# Altium PCB F407ZGT6.PcbDoc (part 1 of 7)
Units mil, origin at the board's own origin, x right, y up, seen from the top; angles counter-clockwise.
Board outline 4380 x 3940 mil, 2 copper layers (Top Layer, Bottom Layer); 88 components, 146 nets, 552 pads, 268 vias.
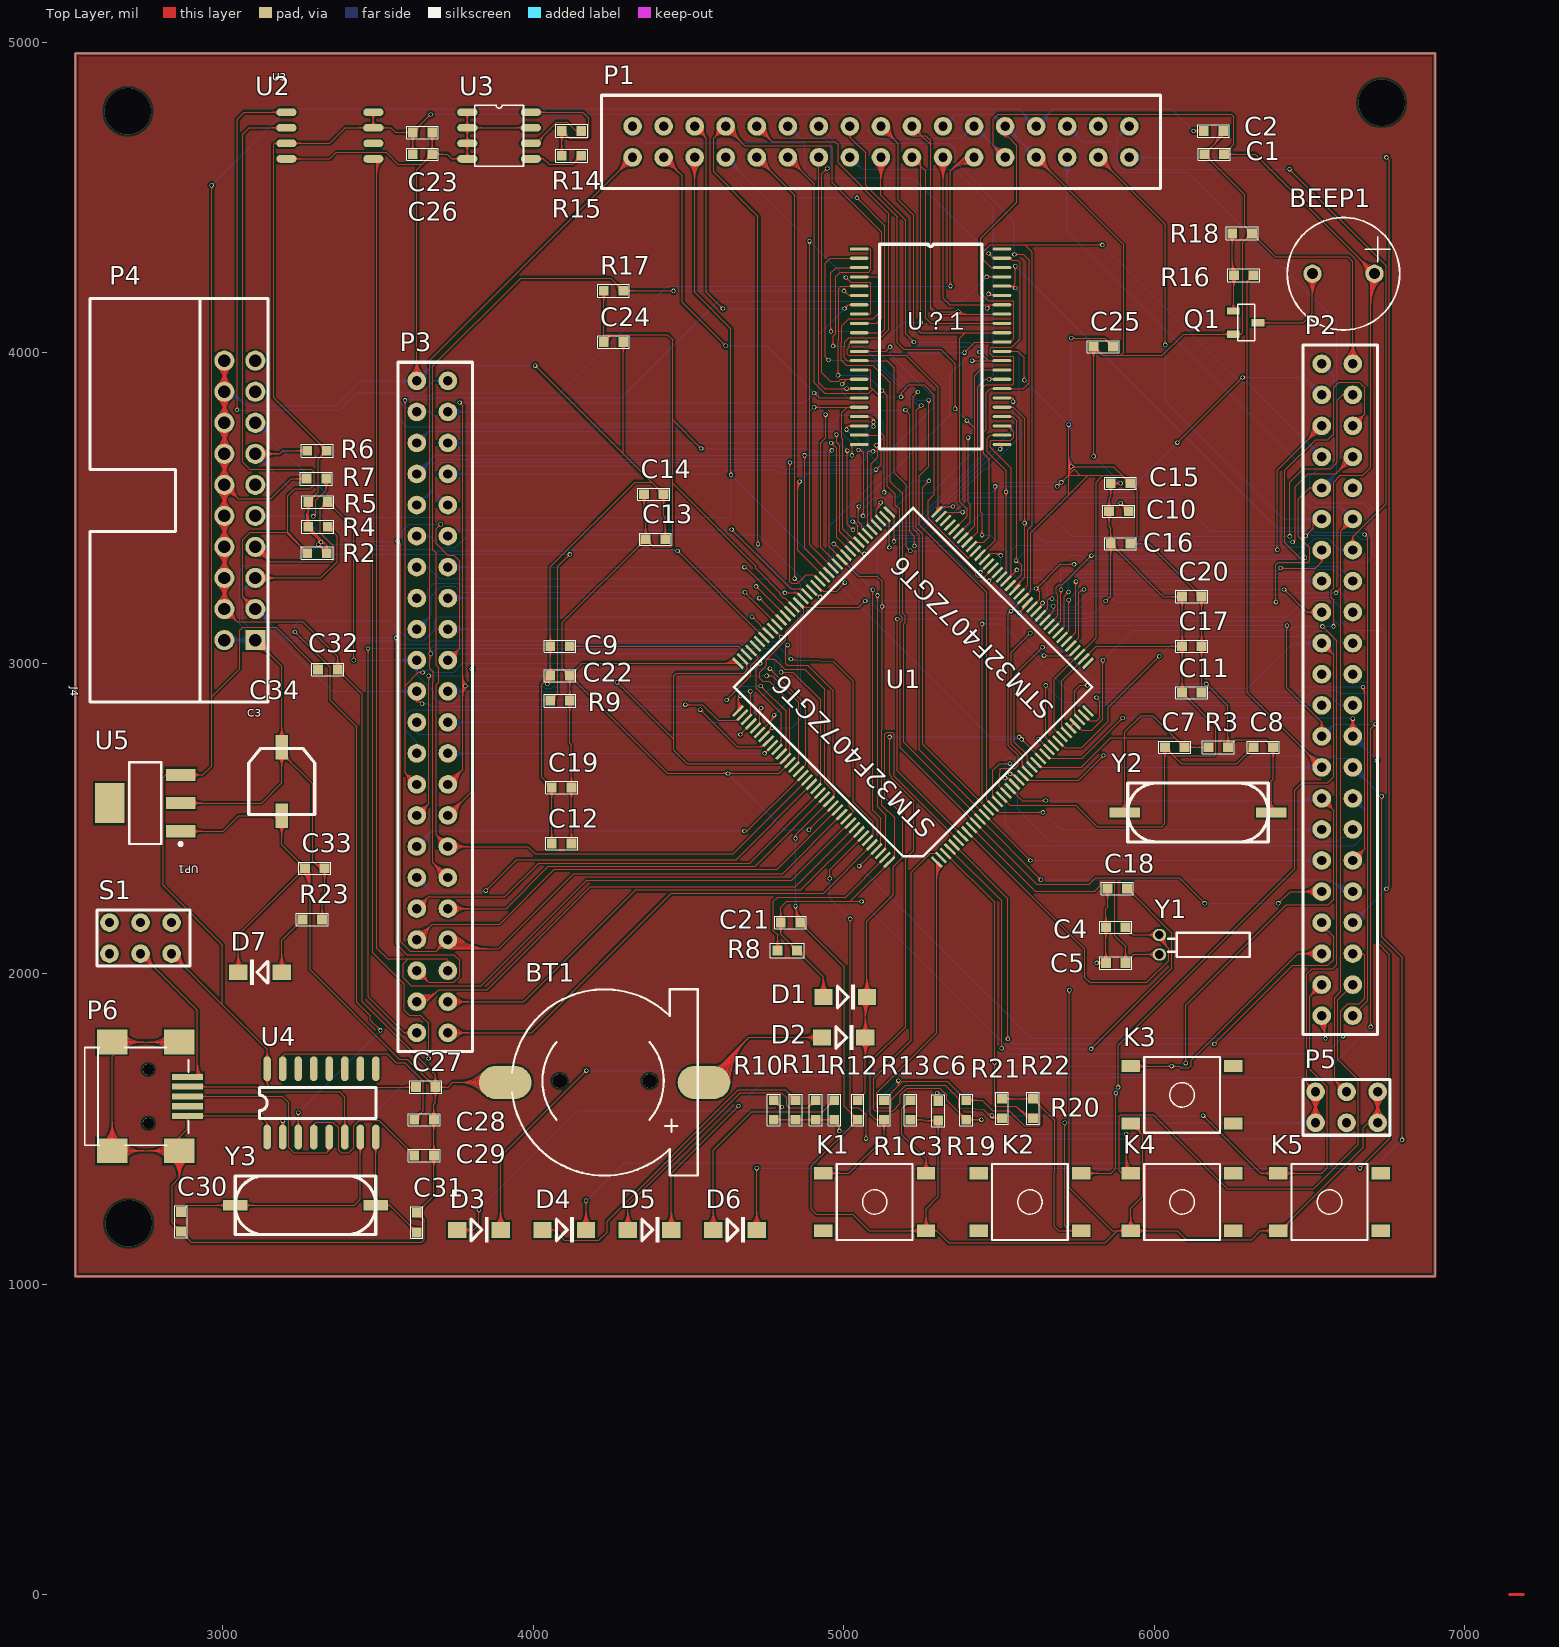
[diagram p0: Top Layer view]
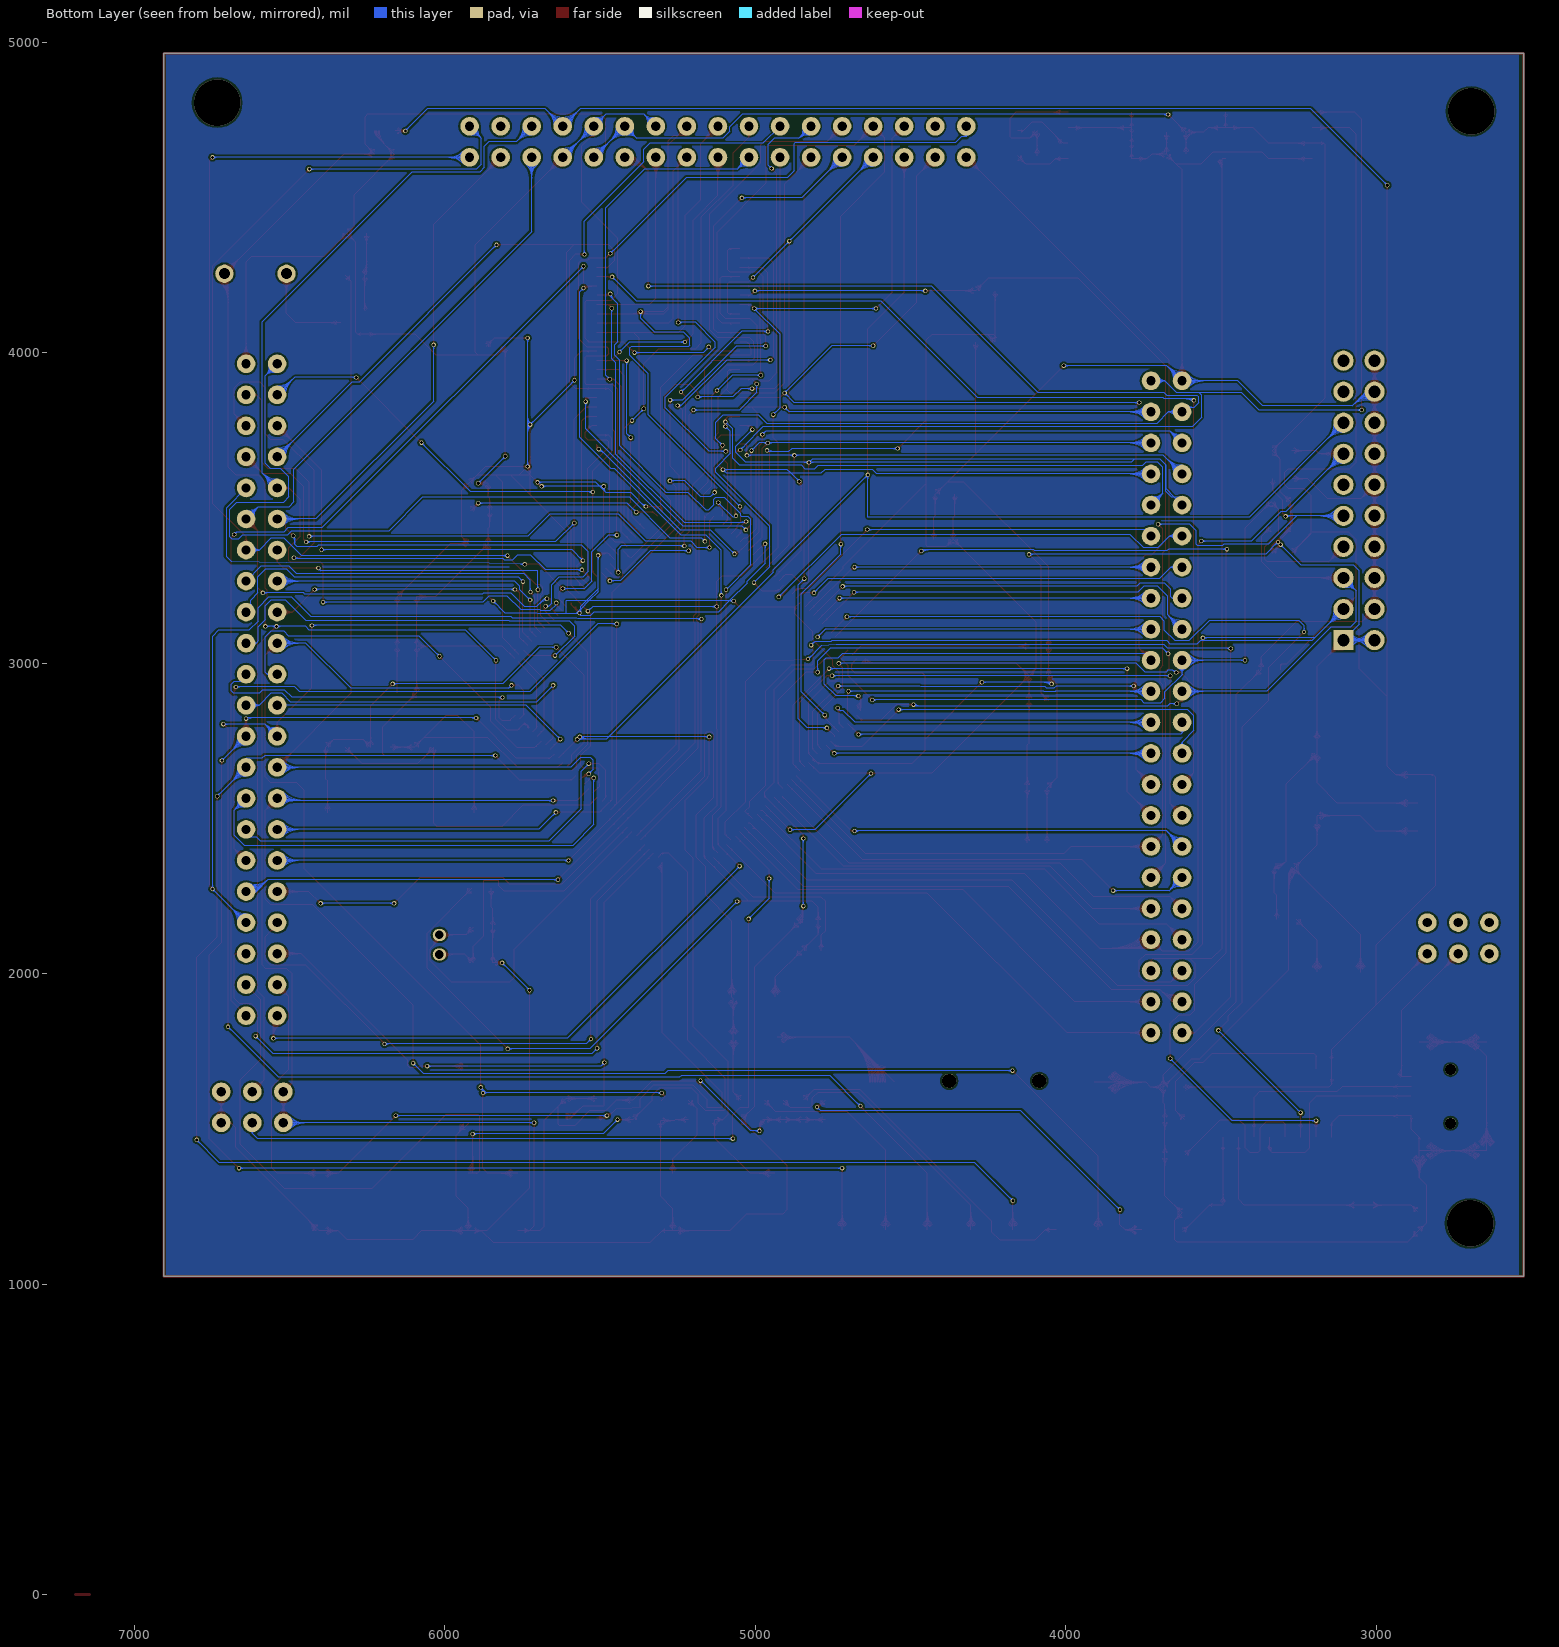
[diagram p1: Bottom Layer view, seen from below]

## Layer stack, top to bottom
Top Solder: solder mask 0.4, Solder Resist, Dk 3.5
Top Layer: signal copper 1.4
Dielectric 1: dielectric 12.6, FR-4, Dk 4.8
Bottom Layer: signal copper 1.4
Bottom Solder: solder mask 0.4, Solder Resist, Dk 3.5

## Board outline
2525,1025 2525,4965 6905,4965 6905,1025

## Design rules (kind name [scope] priority, off if disabled: settings)
Clearance [All] p1: gap=6
DiffPairsRouting [All] p1: maxlimit=10 minlimit=4 mostfreqgap=8 toplayer_minwidth=4 toplayer_maxwidth=10 toplayer_prefwidth=8 bottomlayer_minwidth=4 bottomlayer_maxwidth=10 bottomlayer_prefwidth=8 maxuncoupledlength=500
PolygonConnect [All] p1: connectstyle=Relief reliefconductorwidth=10 reliefentries=4 polygonreliefangle="90 Angle" airgapwidth=10
RoutingCorners [All] p1: cornerstyle=Round minsetback=100 maxsetback=100
RoutingVias [All] p1: holewidth=10 width=14 viastyle="Through Hole" minholewidth=8 minwidth=10 maxholewidth=12 maxwidth=20
SolderMaskExpansion [All] p1: expansion=4
Width [All] p1: maxlimit=6 minlimit=2 preferedwidth=4
27 further rules are at their usual default settings.

## Classes and differential pairs
component class Sheet1: BT1 C1 C2 C3 C4 C5 C6 C7 C8 C9 C10 C11 C12 C13 C14 C15 C16 C18 C19 C20 C21 C22 D1 D2 K1 P1 P2 P3 P4 P5 R1 R2 R3 R4 R5 R6 R7 R8 R9 U1 Y1 Y2
component class Sheet2: BEEP1 C23 C24 C25 C26 C28 C29 C30 C31 C32 C33 C34 D3 D4 D5 D6 D7 K2 K3 K4 K5 P6 Q1 R10 R11 R12 R13 R14 R15 R16 R17 R18 R19 R20 R21 R22 R23 S1 U2 U3 U4 U5 U？1 Y3

## Components (designator, comment, footprint, x,y, rotation, side; value= is the part's Value field where it differs from the comment)
BEEP1 "BEEP-9.5X5.5" BEEP-9.5X5.5 6610,4255 r180 top
BT1 "CR1220" BATERY 4600,1950 r180 top
C1 "100nF" CAP_0603_FIRE 6225,4640 r180 top
C2 "100nF" CAP_0603_FIRE 6160,4715 r0 top
C3 "100nF" CAP_0603_FIRE 5215,1530 r90 top
C4 "CAP_0.1UF_0603_FIRE" CAP_0603_FIRE 5845,2150 r0 top
C5 "CAP_0.1UF_0603_FIRE" CAP_0603_FIRE 5845,2035 r0 top
C6 "100nF" CAP_0603_FIRE 5045,1530 r90 top
C7 "22pF" CAP_0603_FIRE 6035,2730 r0 top
C8 "22pF" CAP_0603_FIRE 6320,2730 r0 top
C9 "2.2uF" CAP_0603_FIRE 4055,3055 r0 top
C10 "2.2uF" CAP_0603_FIRE 5855,3490 r0 top
C11 "100nF" CAP_0603_FIRE 6090,2905 r0 top
C12 "100nF" CAP_0603_FIRE 4060,2420 r0 top
C13 "100nF" CAP_0603_FIRE 4425,3400 r180 top
C14 "100nF" CAP_0603_FIRE 4420,3545 r180 top
C15 "100nF" CAP_0603_FIRE 5860,3580 r0 top
C16 "100nF" CAP_0603_FIRE 5860,3385 r0 top
C17 "100nF" CAP_0603_FIRE 6090,3055 r0 top
C18 "100nF" CAP_0603_FIRE 5850,2275 r0 top
C19 "100nF" CAP_0603_FIRE 4060,2600 r0 top
C20 "100nF" CAP_0603_FIRE 6090,3215 r0 top
C21 "100nF" CAP_0603_FIRE 4860,2165 r180 top
C22 "100nF" CAP_0603_FIRE 4055,2960 r0 top
C23 "100nF" CAP_0603_FIRE 3675,4710 r180 top
C24 "100nF" CAP_0603_FIRE 4290,4035 r180 top
C25 "100nF" CAP_0603_FIRE 5805,4020 r0 top
C26 "100nF" CAP_0603_FIRE 3675,4640 r180 top
C27 "100nF" CAP_0603_FIRE 3685,1635 r180 top
C28 "100nF" CAP_0603_FIRE 3680,1530 r180 top
C29 "100nF" CAP_0603_FIRE 3680,1415 r180 top
C30 "22pF" CAP_0603_FIRE 2865,1170 r90 top
C31 "22pF" CAP_0603_FIRE 3625,1230 r270 top
C32 "100nF" CAP_0603_FIRE 3370,2980 r180 top
C33 "100nF" CAP_0603_FIRE 3265,2340 r0 top
C34 "CAP+_47UF_FIRE" CAP+_47UF_FIRE 3190,2620 r0 top
D1 "IN4148" DIODE_SOP 4935,1925 r0 top
D2 "IN4148" DIODE_SOP 4930,1795 r0 top
D3 "LED1" DIODE_SOP 3755,1175 r0 top
D4 "LED2" DIODE_SOP 4030,1175 r0 top
D5 "LED3" DIODE_SOP 4305,1175 r0 top
D6 "LED4" DIODE_SOP 4580,1175 r0 top
D7 "" DIODE_SOP 3190,2005 r180 top
K1 "KEY" SW6.2/6.2-SMD 5100,1265 r0 top
K2 "KEY" SW6.2/6.2-SMD 5600,1265 r180 top
K3 "KEY" SW6.2/6.2-SMD 6090,1610 r180 top
K4 "KEY" SW6.2/6.2-SMD 6090,1265 r180 top
K5 "KEY" SW6.2/6.2-SMD 6565,1265 r180 top
P1 "TFT" TFT 4320,4630 r90 top
P2 "IO" HEAD2*22 6640,1865 r180 top
P3 "IO" HEAD2*22 3725,1810 r180 top
P4 "JTAG" FC20H 3005,3075 r270 top
P5 "BOOT" BOOT 6520,1520 r90 top
P6 "MINIA_B" USB-MINI 2760,1605 r90 top
Q1 "S8050" SOT-23 6255,4135 r270 top
R1 "RES_1K_0603_FIRE" RES_0603_FIRE 5130,1530 r90 top
R2 "RES_10K_0603_FIRE" RES_0603_FIRE 3335,3355 r180 top
R3 "RES_1K_0603_FIRE" RES_0603_FIRE 6175,2730 r0 top
R4 "RES_10K_0603_FIRE" RES_0603_FIRE 3275,3440 r0 top
R5 "RES_10K_0603_FIRE" RES_0603_FIRE 3275,3520 r0 top
R6 "RES_10K_0603_FIRE" RES_0603_FIRE 3335,3685 r180 top
R7 "RES_10K_0603_FIRE" RES_0603_FIRE 3270,3595 r0 top
R8 "RES-0603-0R" 0603 4850,2075 r180 top
R9 "RES_1K_0603_FIRE" RES_0603_FIRE 4055,2880 r0 top
R10 "RES_1K_0603_FIRE" RES_0603_FIRE 4775,1530 r90 top
R11 "RES_1K_0603_FIRE" RES_0603_FIRE 4845,1530 r90 top
R12 "RES_1K_0603_FIRE" RES_0603_FIRE 4910,1530 r90 top
R13 "RES_1K_0603_FIRE" RES_0603_FIRE 4970,1530 r90 top
R14 "RES_10K_0603_FIRE" RES_0603_FIRE 4155,4715 r180 top
R15 "RES_10K_0603_FIRE" RES_0603_FIRE 4155,4635 r180 top
R16 "RES_100R_0603_FIRE" RES_0603_FIRE 6320,4250 r180 top
R17 "RES_1K_0603_FIRE" RES_0603_FIRE 4290,4200 r180 top
R18 "RES_1K_0603_FIRE" RES_0603_FIRE 6315,4385 r180 top
R19 "RES_4K7_0603_FIRE" RES_0603_FIRE 5305,1590 r270 top
R20 "RES_4K7_0603_FIRE" RES_0603_FIRE 5610,1535 r90 top
R21 "RES_4K7_0603_FIRE" RES_0603_FIRE 5395,1530 r90 top
R22 "RES_4K7_0603_FIRE" RES_0603_FIRE 5510,1535 r90 top
R23 "RES_1K_0603_FIRE" RES_0603_FIRE 3320,2175 r180 top
S1 "switch" switch 2635,2065 r90 top
U1 "F407ZGT6" STM32F407ZGT6 5300,2360 r135 top
U2 "FLASH" SOP8A 3345,4700 r0 top
U3 "EEPROM" SOP8 3890,4700 r0 top
U4 "CH340" SOP16 3510,1430 r90 top
U5 "AMS-1117" AMS-1117-3.3 2750,2550 r180 top
U？1 "IS62WV51216" IS62WV51216 5050,4335 r0 top
Y1 "XTAL_32.768KHZ_FIRE" CRYS-3X8 6025,2125 r180 top
Y2 "XTAL_8M_FIRE" CRYSTAL_SMD_FIRE 5915,2425 r180 top
Y3 "XTAL_12M" XTAL_SMD 3040,1160 r180 top

## Footprints (in the part's own frame and the unit in brackets; to place one, negate y for a bottom-side part, rotate by r counter-clockwise, add the part's x,y. Pads: shape width x height; smd on the part's side, far side on the other; paste and mask are expansions set on the pad)
0603 [mm]
  rect 0.8x0.8 smd: 1(0,0) 2(1.6,0)
  silkscreen extent -0.58,-0.61 2.2,0.61
AMS-1117-3.3 [mm]
  rect 2.4x1 smd: 1(-2.9,2.3) 2(-2.9,0) 3(-2.9,-2.3)
  rect 2.4x3.3 smd: 4(2.9,0)
  silkscreen extent -3.03,-3.35 1.3,3.47
BATERY [mil]
  round 46 hole 46: 0(515,295) 0/2(225,295)
  oval 169.29x106.3 smd: 1(50,300) 2(690,300)
  silkscreen extent 70,0 668,600
BEEP-9.5X5.5 [mm]
  round 1.5 hole 0.9: 1(-2.54,0) 2(2.54,0)
  silkscreen extent -4.6,-4.6 4.6,4.6
BOOT [mil]
  round 60 hole 30: 1(0,0) 2(100,0) 3(0,-100) 4(100,-100) 5(0,-200) 6(100,-200)
  silkscreen extent -40,-240 140,40
CAP+_47UF_FIRE [mm]
  rect 1x2 smd: 1(0,2.8) 2(0,-2.8)
  silkscreen extent -2.7,-2.7 2.7,2.7
CAP_0603_FIRE [mm]
  rect 0.8x0.8 smd: 1(0,0) 2(1.6,0)
  silkscreen extent -0.5,-0.5 2.1,0.5
CRYS-3X8 [mm]
  oval 1.1x1 hole 0.7: 1(0.199,-0.003) 2(0.199,1.597)
  silkscreen extent -7.2,-0.2 -0.5,1.8
CRYSTAL_SMD_FIRE [mm]
  rect 2.5x0.85 smd: 1(-11.75,-2.4) 2(0.25,-2.4)
  silkscreen extent -11.5,-4.8 0,0
DIODE_SOP [mm]
  rect 1.5x1.3 smd: 1(0,0) 2(3.556,0)
  silkscreen extent 1.14,-1.02 2.56,1.02
FC20H [mil]
  rect 65x65 hole 40: 1(0,100)
  round 65 hole 40: 2(0,0) 3(-100,100) 4(-100,0) 5(-200,100) 6(-200,0) 7(-300,100) 8(-300,0) 9(-400,100) 10(-400,0) 11(-500,100) 12(-500,0) 13(-600,100) 14(-600,0) 15(-700,100) 16(-700,0) 17(-800,100) 18(-800,0) 19(-900,100) 20(-900,0)
  silkscreen extent -1100,-433 200,141
HEAD2*22 [mil]
  round 60 hole 30: 1(0,0) 2(100,0) 3(0,-100) 4(100,-100) 5(0,-200) 6(100,-200) 7(0,-300) 8(100,-300) 9(0,-400) 10(100,-400) 11(0,-500) 12(100,-500) 13(0,-600) 14(100,-600) 15(0,-700) 16(100,-700) 17(0,-800) 18(100,-800) 19(0,-900) 20(100,-900) 21(0,-1000) 22(100,-1000) 23(0,-1100) 24(100,-1100) 25(0,-1200) 26(100,-1200) 27(0,-1300) 28(100,-1300) 29(0,-1400) 30(100,-1400) 31(0,-1500) 32(100,-1500) 33(0,-1600) 34(100,-1600) 35(0,-1700) 36(100,-1700) 37(0,-1800) 38(100,-1800) 39(0,-1900) 40(100,-1900) 41(0,-2000) 42(100,-2000) 43(0,-2100) 44(100,-2100)
  silkscreen extent -80,-2160 160,60
IS62WV51216 [mil]
  rect 60x10 smd: 1(0,0)
  oval 60x10 smd: 2(0,-30) 3(0,-60) 4(0,-90) 5(0,-120) 6(0,-150) 7(0,-180) 8(0,-210) 9(0,-240) 10(0,-270) 11(0,-300) 12(0,-330) 13(0,-360) 14(0,-390) 15(0,-420) 16(0,-450) 17(0,-480) 18(0,-510) 19(0,-540) 20(0,-570) 21(0,-600) 22(0,-630) 23(460,-630) 24(460,-600) 25(460,-570) 26(460,-540) 27(460,-510) 28(460,-480) 29(460,-450) 30(460,-420) 31(460,-390) 32(460,-360) 33(460,-330) 34(460,-300) 35(460,-270) 36(460,-240) 37(460,-210) 38(460,-180) 39(460,-150) 40(460,-120) 41(460,-90) 42(460,-60) 43(460,-30) 44(460,0)
  silkscreen extent 65,-645 395,15
RES_0603_FIRE [mm]
  rect 0.8x0.8 smd: 1(0,0) 2(1.6,0)
  silkscreen extent -0.51,-0.53 2.1,0.52
SOP8 [mil]
  oval 65x25 smd: 1(-102.36,75) 2(-102.36,25) 3(-102.36,-25) 4(-102.36,-75) 5(102.36,-75) 6(102.36,-25) 7(102.36,25) 8(102.36,75)
  silkscreen extent -79,-98 79,98
SOP8A [mil]
  oval 65x25 smd: 1(-140,75) 2(-140,25) 3(-140,-25) 4(-140,-75) 5(140,-75) 6(140,-25) 7(140,25) 8(140,75)
SOP16 [mil]
  oval 80x24 smd: 1(44,367) 2(44,317) 3(44,267) 4(44,217) 5(44,167) 6(44,117) 7(44,67) 8(44,17) 9(264,17) 10(264,67) 11(264,117) 12(264,167) 13(264,217) 14(264,267) 15(264,317) 16(264,367)
  silkscreen extent 104,17 204,392
SOT-23 [mm]
  rect 0.6x1.05 smd: 1(0,0) 2(1.9,0) 3(0.965,2.032)
  silkscreen extent -0.55,0.35 2.45,1.75
STM32F407ZGT6 [mm]
  oval 1.2x0.22 smd: 1(0,0)
  rect 1.2x0.22 smd: 2(0,-0.5) 3(0,-1) 4(0,-1.5) 5(0,-2) 6(0,-2.5) 7(0,-3) 8(0,-3.5) 9(0,-4) 10(0,-4.5) 11(0,-5) 12(0,-5.5) 13(0,-6) 14(0,-6.5) 15(0,-7) 16(0,-7.5) 17(0,-8) 18(0,-8.5) 19(0,-9) 20(0,-9.5) 21(0,-10) 22(0,-10.5) 23(0,-11) 24(0,-11.5) 25(0,-12) 26(0,-12.5) 27(0,-13) 28(0,-13.5) 29(0,-14) 30(0,-14.5) 31(0,-15) 32(0,-15.5) 33(0,-16) 34(0,-16.5) 35(0,-17) 36(0,-17.5) 73(23,-17.5) 74(23,-17) 75(23,-16.5) 76(23,-16) 77(23,-15.5) 78(23,-15) 79(23,-14.5) 80(23,-14) 81(23,-13.5) 82(23,-13) 83(23,-12.5) 84(23,-12) 85(23,-11.5) 86(23,-11) 87(23,-10.5) 88(23,-10) 89(23,-9.5) 90(23,-9) 91(23,-8.5) 92(23,-8) 93(23,-7.5) 94(23,-7) 95(23,-6.5) 96(23,-6) 97(23,-5.5) 98(23,-5) 99(23,-4.5) 100(23,-4) 101(23,-3.5) 102(23,-3) 103(23,-2.5) 104(23,-2) 105(23,-1.5) 106(23,-1) 107(23,-0.5) 108(23,0)
  rect 0.22x1.2 smd: 37(2.75,-20.25) 38(3.25,-20.25) 39(3.75,-20.25) 40(4.25,-20.25) 41(4.75,-20.25) 42(5.25,-20.25) 43(5.75,-20.25) 44(6.25,-20.25) 45(6.75,-20.25) 46(7.25,-20.25) 47(7.75,-20.25) 48(8.25,-20.25) 49(8.75,-20.25) 50(9.25,-20.25) 51(9.75,-20.25) 52(10.25,-20.25) 53(10.75,-20.25) 54(11.25,-20.25) 55(11.75,-20.25) 56(12.25,-20.25) 57(12.75,-20.25) 58(13.25,-20.25) 59(13.75,-20.25) 60(14.25,-20.25) 61(14.75,-20.25) 62(15.25,-20.25) 63(15.75,-20.25) 64(16.25,-20.25) 65(16.75,-20.25) 66(17.25,-20.25) 67(17.75,-20.25) 68(18.25,-20.25) 69(18.75,-20.25) 70(19.25,-20.25) 71(19.75,-20.25) 72(20.25,-20.25) 109(20.25,2.75) 110(19.75,2.75) 111(19.25,2.75) 112(18.75,2.75) 113(18.25,2.75) 114(17.75,2.75) 115(17.25,2.75) 116(16.75,2.75) 117(16.25,2.75) 118(15.75,2.75) 119(15.25,2.75) 120(14.75,2.75) 121(14.25,2.75) 122(13.75,2.75) 123(13.25,2.75) 124(12.75,2.75) 125(12.25,2.75) 126(11.75,2.75) 127(11.25,2.75) 128(10.75,2.75) 129(10.25,2.75) 130(9.75,2.75) 131(9.25,2.75) 132(8.75,2.75) 133(8.25,2.75) 134(7.75,2.75) 135(7.25,2.75) 136(6.75,2.75) 137(6.25,2.75) 138(5.75,2.75) 139(5.25,2.75) 140(4.75,2.75) 141(4.25,2.75) 142(3.75,2.75) 143(3.25,2.75) 144(2.75,2.75)
  silkscreen extent 1.13,-19.11 21.86,1.62
SW6.2/6.2-SMD [mm]
  rect 1.5x1 smd: 1(-4.2,2.35) 2(4.2,2.35) 3(-4.2,-2.35) 4(4.2,-2.35)
  silkscreen extent -3.1,-3.1 3.1,3.1
switch [mil]
  round 60 hole 30: 1(0,0) 2(0,-100) 3(0,-200) 4(100,-200) 5(100,-100) 6(100,0)
  silkscreen extent -40,-260 140,40
TFT [mil]
  round 60 hole 30: 1(0,0) 2(100,0) 3(0,-100) 4(100,-100) 5(0,-200) 6(100,-200) 7(0,-300) 8(100,-300) 9(0,-400) 10(100,-400) 11(0,-500) 12(100,-500) 13(0,-600) 14(100,-600) 15(0,-700) 16(100,-700) 17(0,-800) 18(100,-800) 19(0,-900) 20(100,-900) 21(0,-1000) 22(100,-1000) 23(0,-1100) 24(100,-1100) 25(0,-1200) 26(100,-1200) 27(0,-1300) 28(100,-1300) 29(0,-1400) 30(100,-1400) 31(0,-1500) 32(100,-1500) 33(0,-1600) 34(100,-1600)
  silkscreen extent -100,-1700 200,100
USB-MINI [mm]
  rect 0.508x2.54 smd: 1(1.6,-3.2) 2(0.8,-3.2) 3(0,-3.2) 4(-0.8,-3.2) 5(-1.6,-3.2)
  rect 2.032x2.5 smd: 6(-4.45,-2.55) 7(-4.45,2.95) 8(4.45,2.95) 9(4.45,-2.55)
  round 0.9 hole 0.9 unplated: 10(2.2,0) 11(-2.2,0)
  silkscreen extent -4,-3.3 4,5.2
XTAL_SMD [mm]
  rect 2x0.85 smd: 1(-11.5,-2.4) 2(0,-2.4)
  silkscreen extent -11.5,-4.8 0,0

## Part data
C1 C2 C3 C6 C7 C8 C9 C10 C11 C12 C13 C14 C15 C16 C17 C18 C19 C20 C21 C22 C23 C24 C25 C26 C27 C28 C29 C30 C31 C32 C33: library part CAP
C4 C5: "SURFACE MOUNT CAPACITOR 0.031 X 0.061 INCHES"
D3 D4 D5 D6 D7: library part LED
Q1: "NPN"
R1 R3 R9 R10 R11 R12 R13 R16 R17 R18 R19 R20 R21 R22 R23: "0402"
R2 R4 R5 R6 R7 R14 R15: "SURFACE MOUNT RESISTOR 0.031 X 0.061 INCHES, 1/10W"
R8: "0603, 50V, 1/10W, 5%"
Y1 Y2: "CRYSTAL"

## Via types
v1: diameter 14, hole 10, Top Layer to Bottom Layer, 265 vias
v2: diameter 150, hole 150, Top Layer to Bottom Layer, 3 vias

## Nets (pads, with @x,y where several pads share a name; then routed paths per layer and width w, separated by ;. In a path a pad name is that pad's centre, name@x,y a point inside that pad or via, vN(x,y) a via of type N, cw(c..) or ccw(c..) an arc to the next point about the centre after c; other vN are vias at no path point)
A0: P2.10 U1.10 U？1.5 | length 3803.4
  Top Layer w4: v1@4978.46,3931.54 ccw(c4969.93,3940.07) 4982,3940.07 ccw(c4994.07,3940.07) v1@4985.54,3931.54 ; v1(4982,3928) 4982,4044 4984,4046 4984,4207 4992,4215 U？1.5@5050,4215 ; U？1.5@5022.88,4212.88 ccw(c5017.76,4207.76) 5017.76,4215 ccw(c5017.76,4222.24) U？1.5@5022.88,4217.12 ; v1@5123,3874 cw(c5123,3859.51) 5133.24,3869.76 ; v1(5123,3879) 5124,3879 5140.5,3862.5 5140.5,3570.31 5166,3544.81 5166,3509.81 5180,3495.81 5180,3157.2 5188,3149.2 5188,3136.77 5183,3131.77 5183,2727.55 U1.10@5425.27,2485.27 5622.55,2288 5791,2288 5812,2309 6081,2309 v1(6163,2227) ; v1@5128,3879 ccw(c5137.66,3879) 5130.83,3872.17 ; U1.10@5409.3,2498.91 ccw(c5403.68,2498.91) 5407.65,2502.89 ccw(c5411.63,2506.87) U1.10@5411.63,2501.25 ; U1.10@5438.91,2469.3 cw(c5438.91,2463.68) 5442.89,2467.65 cw(c5446.87,2471.63) U1.10@5441.25,2471.63 ; v1@6158,2227 ccw(c6145.93,2227) 6154.46,2235.54 ccw(c6163,2244.07) v1@6163,2232 ; v1(6400,2227) 6438,2265 P2.10@6540,2265 ; v1@6400,2232 ccw(c6400,2244.07) 6408.54,2235.54 ccw(c6417.07,2227) v1@6405,2227 ; P2.10@6520.2,2245.2 ccw(c6472.4,2197.4) 6472.4,2265 ccw(c6472.4,2332.6) P2.10@6520.2,2284.8 ; P2.10@6523.03,2248.03 ccw(c6482.06,2207.06) 6482.06,2265 ccw(c6482.06,2322.94) P2.10@6523.03,2281.97 ; P2.10@6525.86,2250.86 ccw(c6491.72,2216.72) 6491.72,2265 ccw(c6491.72,2313.28) P2.10@6525.86,2279.14 ; P2.10@6528.69,2253.69 ccw(c6501.37,2226.37) 6501.37,2265 ccw(c6501.37,2303.63) P2.10@6528.69,2276.31
  Bottom Layer w4: v1(4982,3928) 5074,3928 v1(5123,3879) ; v1@4985.54,3924.46 cw(c4994.07,3915.93) 4994.07,3928 cw(c4994.07,3940.07) v1@4985.54,3931.54 ; v1@5118,3879 ccw(c5105.93,3879) 5114.46,3887.54 ccw(c5123,3896.07) v1@5123,3884 ; v1(6163,2227) v1(6400,2227) ; v1@6166.54,2223.46 cw(c6175.07,2214.93) 6175.07,2227 cw(c6175.07,2239.07) v1@6166.54,2230.54 ; v1@6396.46,2223.46 ccw(c6387.93,2214.93) 6387.93,2227 ccw(c6387.93,2239.07) v1@6396.46,2230.54
A1: P2.9 U1.11 U？1.4 | length 4027.7
  Top Layer w4: U？1.4@5050,4245 5108,4245 5113,4240 5113,4128 5095,4110 5016,4110 4994,4088 4994,4036 4992,4034 4992,3977 5008,3961 5094,3961 5150.5,3904.5 5150.5,3585.31 5190,3545.81 5190,3161.34 5198,3153.34 5198,3132.63 5193,3127.63 5193,2745.39 U1.11@5439.19,2499.19 v1(5635.39,2303) ; U？1.4@5077.12,4242.88 cw(c5082.24,4237.76) 5082.24,4245 cw(c5082.24,4252.24) U？1.4@5077.12,4247.12 ; U1.11@5423.22,2512.84 ccw(c5417.6,2512.84) 5421.57,2516.81 ccw(c5425.55,2520.79) U1.11@5425.55,2515.17 ; U1.11@5452.84,2483.22 cw(c5452.84,2477.6) 5456.81,2481.57 cw(c5460.79,2485.55) U1.11@5455.17,2485.55 ; v1@5630.39,2303 ccw(c5618.32,2303) 5626.85,2311.54 ccw(c5635.39,2320.07) v1@5635.39,2308
  Bottom Layer w4: v1(5635.39,2303) 6570,2303 ; v1@5638.92,2299.46 cw(c5647.46,2290.93) 5647.46,2303 cw(c5647.46,2315.07) v1@5638.92,2306.54 ; 6574.27,2298.73 ccw(c6611.29,2335.75) P2.9@6630.98,2287.24 ; 6578.53,2294.47 ccw(c6613.75,2329.68) P2.9@6632.48,2283.53 ; 6582.8,2290.2 ccw(c6616.22,2323.61) P2.9@6633.98,2279.83 ; 6587.07,2285.93 ccw(c6618.68,2317.54) P2.9@6635.49,2276.12 ; 6591.33,2281.67 ccw(c6621.14,2311.47) P2.9@6636.99,2272.41 ; 6595.6,2277.4 ccw(c6623.6,2305.41) P2.9@6638.5,2268.71 ; 6599.87,2273.13 ccw(c6626.07,2299.34) P2.9@6640,2265 6608,2265 ; 6604.13,2268.87 ccw(c6628.53,2293.27) P2.9@6641.5,2261.29 ; 6608.4,2264.6 ccw(c6630.99,2287.2) P2.9@6643.01,2257.59 ; P2.9@6612.25,2261.28 ccw(c6608,2260.72) 6608,2265 ; P2.9@6612.25,2268.72 cw(c6608,2269.28) 6608,2265 ; P2.9@6629.47,2290.95 cw(c6608.83,2341.82) 6570,2303 ; 6570,2303 6608,2265
A2: P2.12 U1.12 U？1.3 | length 3734.6
  Top Layer w4: v1@4955.46,4072.54 ccw(c4946.93,4081.07) 4959,4081.07 ccw(c4971.07,4081.07) v1@4962.54,4072.54 ; v1(4959,4069) 4959,4258 4976,4275 U？1.3@5050,4275 ; U？1.3@5022.88,4272.88 ccw(c5017.76,4267.76) 5017.76,4275 ccw(c5017.76,4282.24) U？1.3@5022.88,4277.12 ; v1@5234,3874 cw(c5221.93,3874) 5230.46,3865.46 cw(c5239,3856.93) v1@5239,3869 ; v1(5239,3874) 5224,3859 5224,3432.86 5244.15,3412.71 5244.15,2722.08 U1.12@5453.11,2513.11 v1(5601.23,2365) ; U1.12@5437.14,2526.76 ccw(c5431.52,2526.76) 5435.49,2530.73 ccw(c5439.47,2534.71) U1.12@5439.47,2529.09 ; U1.12@5466.76,2497.14 cw(c5466.76,2491.52) 5470.73,2495.49 cw(c5474.71,2499.47) U1.12@5469.09,2499.47 ; v1@5596.23,2365 ccw(c5584.16,2365) 5592.69,2373.54 ccw(c5601.23,2382.07) v1@5601.23,2370
  Bottom Layer w4: v1(4959,4069) 5044,4069 v1(5239,3874) ; v1@4962.54,4065.46 cw(c4971.07,4056.93) 4971.07,4069 cw(c4971.07,4081.07) v1@4962.54,4072.54 ; v1@5234,3874 ccw(c5221.93,3874) 5230.46,3882.54 ccw(c5239,3891.07) v1@5239,3879 ; v1(5601.23,2365) P2.12@6540,2365 ; v1@5604.76,2361.46 cw(c5613.3,2352.93) 5613.3,2365 cw(c5613.3,2377.07) v1@5604.76,2368.54 ; P2.12@6520.2,2345.2 ccw(c6472.4,2297.4) 6472.4,2365 ccw(c6472.4,2432.6) P2.12@6520.2,2384.8 ; P2.12@6523.03,2348.03 ccw(c6482.06,2307.06) 6482.06,2365 ccw(c6482.06,2422.94) P2.12@6523.03,2381.97 ; P2.12@6525.86,2350.86 ccw(c6491.72,2316.72) 6491.72,2365 ccw(c6491.72,2413.28) P2.12@6525.86,2379.14 ; P2.12@6528.69,2353.69 ccw(c6501.37,2326.37) 6501.37,2365 ccw(c6501.37,2403.63) P2.12@6528.69,2376.31
A3: P2.11 U1.13 U？1.2 | length 5102.6
  Top Layer w4: v1@4946,3977 ccw(c4933.93,3977) 4942.46,3985.54 ccw(c4951,3994.07) v1@4951,3982 ; v1(4951,3977) 4940,3988 4940,4288 4957,4305 U？1.2@5050,4305 ; U？1.2@5022.88,4302.88 ccw(c5017.76,4297.76) 5017.76,4305 ccw(c5017.76,4312.24) U？1.2@5022.88,4307.12 ; v1@5245,3830.68 cw(c5232.93,3830.68) 5241.46,3822.15 cw(c5250,3813.61) v1@5250,3825.68 ; v1(5250,3830.68) 5234,3814.68 5234,3437 5255,3416 5255,2739 5446,2548 ; v1@5442.46,3123.46 cw(c5433.93,3114.93) 5446,3114.93 cw(c5458.07,3114.93) v1@5449.54,3123.46 ; v1(5446,3127) 5446,2548 ; U1.13@5451.06,2540.67 ccw(c5445.43,2540.67) 5449.41,2544.65 ccw(c5453.39,2548.63) U1.13@5453.39,2543 ; U1.13@5467.03,2527.03 5446.06,2548 5446,2548 ; P2.11@6640,2365 6678,2403 ; P2.11@6642.79,2380.75 ccw(c6646.53,2401.89) 6661.71,2386.71 ccw(c6676.89,2371.53) P2.11@6655.75,2367.79 ; P2.11@6643.49,2384.69 ccw(c6648.17,2411.12) 6667.14,2392.14 ccw(c6686.12,2373.17) P2.11@6659.69,2368.49 ; P2.11@6644.19,2388.63 ccw(c6649.8,2420.34) 6672.57,2397.57 ccw(c6695.34,2374.8) P2.11@6663.63,2369.19 ; P2.11@6644.88,2392.57 ccw(c6651.43,2429.56) 6678,2403 ; P2.11@6667.57,2369.88 cw(c6704.56,2376.43) 6678,2403 ; v1@6669.46,2920.46 cw(c6648.86,2899.86) 6678,2899.86 ; v1@6672.29,2923.29 cw(c6658.51,2909.51) 6678,2909.51 ; v1(6673,2924) 6678,2919 ; v1@6675.15,2919.49 cw(c6676.23,2917.23) 6678,2919 ; v1@6677.51,2921.85 ccw(c6679.77,2920.77) 6678,2919 ; 6678,2403 6678,2919
  Bottom Layer w4: v1(4951,3977) 5091.9,3977 5238.22,3830.68 ; v1@4954.54,3973.46 cw(c4963.07,3964.93) 4963.07,3977 cw(c4963.07,3989.07) v1@4954.54,3980.54 ; v1@5246.4,3827.21 ccw(c5238.22,3819.31) 5238.22,3830.68 ; v1@5246.4,3834.16 cw(c5238.22,3842.06) 5238.22,3830.68 ; v1(5250,3830.68) 5238.22,3830.68 ; v1(5446,3127) 5507,3127 5726,2908 6467,2908 6483,2924 v1(6673,2924) ; v1@5449.54,3123.46 cw(c5458.07,3114.93) 5458.07,3127 cw(c5458.07,3139.07) v1@5449.54,3130.54 ; v1@6669.46,2920.46 ccw(c6660.93,2911.93) 6660.93,2924 ccw(c6660.93,2936.07) v1@6669.46,2927.54
A4: P2.14 U1.14 U？1.1 | length 3817.2
  Top Layer w4: v1@4962.46,4025.54 ccw(c4953.93,4034.07) 4966,4034.07 ccw(c4978.07,4034.07) v1@4969.54,4025.54 ; v1(4966,4022) 4966,4054 4974,4062 4974,4245 4989,4260 5080,4260 5088,4268 5088,4331 5084,4335 U？1.1@5050,4335 ; U？1.1@5077.12,4332.88 cw(c5082.24,4327.76) 5082.24,4335 cw(c5082.24,4342.24) U？1.1@5077.12,4337.12 ; v1@5270.46,3844.46 cw(c5261.93,3835.93) 5274,3835.93 cw(c5286.07,3835.93) v1@5277.54,3844.46 ; v1(5274,3848) 5274,3634.5 5244,3604.5 5244,3446.31 5461,3229.31 5461,2560.9 U1.14@5480.95,2540.95 5501.9,2520 v1(5642,2520) ; U1.14@5464.98,2554.59 ccw(c5459.35,2554.59) 5463.33,2558.57 ccw(c5467.31,2562.55) U1.14@5467.31,2556.92 ; U1.14@5494.59,2524.98 cw(c5494.59,2519.35) 5498.57,2523.33 cw(c5502.55,2527.31) U1.14@5496.92,2527.31 ; v1@5638.46,2516.46 ccw(c5629.93,2507.93) 5629.93,2520 ccw(c5629.93,2532.07) v1@5638.46,2523.54
  Bottom Layer w4: v1(4966,4022) 5061.32,4022 5235.32,3848 v1(5274,3848) ; v1@4969.54,4018.46 cw(c4978.07,4009.93) 4978.07,4022 cw(c4978.07,4034.07) v1@4969.54,4025.54 ; v1@5270.46,3844.46 ccw(c5261.93,3835.93) 5261.93,3848 ccw(c5261.93,3860.07) v1@5270.46,3851.54 ; v1@5642,2515 cw(c5642,2502.93) 5650.54,2511.46 cw(c5659.07,2520) v1@5647,2520 ; v1(5642,2520) 5697,2465 P2.14@6540,2465 ; P2.14@6520.2,2445.2 ccw(c6472.4,2397.4) 6472.4,2465 ccw(c6472.4,2532.6) P2.14@6520.2,2484.8 ; P2.14@6523.03,2448.03 ccw(c6482.06,2407.06) 6482.06,2465 ccw(c6482.06,2522.94) P2.14@6523.03,2481.97 ; P2.14@6525.86,2450.86 ccw(c6491.72,2416.72) 6491.72,2465 ccw(c6491.72,2513.28) P2.14@6525.86,2479.14 ; P2.14@6528.69,2453.69 ccw(c6501.37,2426.37) 6501.37,2465 ccw(c6501.37,2503.63) P2.14@6528.69,2476.31
A5: U？1.44
A6: P1.2 P2.35 U1.50 U？1.43 | length 4583.3
  Top Layer w4: v1@5442.14,3416.54 ccw(c5433.6,3425.07) 5445.68,3425.07 ccw(c5457.75,3425.07) v1@5449.21,3416.54 ; v1(5445.68,3413) 5445.68,3482.89 5442,3486.57 5442,3883 5457,3898 5544,3898 5548,3902 5548,3986 5544,3990 5480,3990 5472,3998 5472,4014 5476,4018 5541,4018 5568,4045 5568,4291 5560,4299 5541,4299 5535,4305 U？1.43@5510,4305 5481,4305 5477,4309 ; v1(5467,4320) 5469,4320 5477,4312 ; v1@5467.74,4315.05 cw(c5469.34,4304.34) 5477,4312 ; v1@5472,4320 ccw(c5479.24,4320) 5474.12,4314.88 ; U？1.43@5483.78,4307.74 cw(c5481.31,4313.31) 5477,4309 ; U？1.43@5535,4302 cw(c5535,4294.76) 5540.12,4299.88 cw(c5545.24,4305) U？1.43@5538,4305 ; U1.50@5606.23,3181.24 5606.23,3181.44 5631,3206.21 5631,3230 v1(5620,3241) 5698,3319 v1(5742.38,3319) ; U1.50@5619.87,3197.22 ccw(c5619.87,3202.37) 5623.51,3198.73 ; v1@5620,3236 cw(c5620,3223.93) 5628.54,3232.46 cw(c5637.07,3241) 5625,3241 cw(c5637.07,3241) 5628.54,3249.54 cw(c5620,3258.07) v1@5620,3246 ; U1.50@5622.2,3194.89 cw(c5628.3,3194.89) 5623.98,3199.2 ; v1@5738.85,3315.46 ccw(c5730.31,3306.93) 5730.31,3319 ccw(c5730.31,3331.07) v1@5738.85,3322.54 ; 5477,4309 5477,4312
  Bottom Layer w4: P1.2@4314.63,4702.52 cw(c4313.36,4696) 4320,4696 ; P1.2@4320,4730 4320,4696 ; P1.2@4325.37,4702.52 ccw(c4326.64,4696) 4320,4696 ; v1(5445.68,3413) 5473.73,3413 5527,3359.73 5527,3264 5550,3241 v1(5620,3241) ; v1@5449.21,3409.46 cw(c5457.75,3400.93) 5457.75,3413 cw(c5457.75,3425.07) v1@5449.21,3416.54 ; v1@5462,4320 ccw(c5449.93,4320) 5458.46,4328.54 ccw(c5467,4337.07) v1@5467,4325 ; v1(5467,4320) 5222,4565 4896,4565 4875,4586 4875,4674 4872,4677 4356,4677 4337,4696 4320,4696 ; v1@5616.46,3237.46 ccw(c5607.93,3228.93) 5607.93,3241 ccw(c5607.93,3253.07) v1@5616.46,3244.54 ; v1(5742.38,3319) 5856.5,3322 6508.98,3324.65 6686,3327 6703,3344 6703,3502 P2.35@6640,3565 ; v1@5745.82,3322.63 ccw(c5754.13,3331.38) 5754.45,3319.32 ccw(c5754.77,3307.25) v1@5746.01,3315.56
A7: P2.38 U1.53 U？1.42 | length 3020.1
  Top Layer w4: U？1.42@5482.88,4272.88 ccw(c5477.76,4267.76) 5477.76,4275 ccw(c5477.76,4282.24) U？1.42@5482.88,4277.12 ; U？1.42@5510,4275 5476,4275 5452,4299 5452,4328 5472,4348 5584,4348 ; U1.53@5564.47,3223 5593,3251.53 5593,3431.05 5607,3445.05 5607,4325 5584,4348 ; U1.53@5578.11,3238.97 ccw(c5578.11,3244.6) 5582.09,3240.62 ccw(c5586.07,3236.64) U1.53@5580.44,3236.64 ; v1@5829.87,4344.46 ccw(c5821.33,4335.93) 5821.33,4348 ccw(c5821.33,4360.07) v1@5829.87,4351.54 ; v1(5833.4,4348) 5584,4348
  Bottom Layer w4: v1@5833.4,4343 cw(c5833.4,4330.93) 5841.94,4339.46 cw(c5850.48,4348) v1@5838.4,4348 ; v1(5833.4,4348) 6275.81,3905.6 6299.4,3905.6 P2.38@6540,3665 ; P2.38@6512,3665 ccw(c6444.4,3665) 6492.2,3712.8 ccw(c6540,3760.6) P2.38@6540,3693 ; P2.38@6516,3665 ccw(c6458.06,3665) 6499.03,3705.97 ccw(c6540,3746.94) P2.38@6540,3689 ; P2.38@6520,3665 ccw(c6471.72,3665) 6505.86,3699.14 ccw(c6540,3733.28) P2.38@6540,3685 ; P2.38@6524,3665 ccw(c6485.37,3665) 6512.69,3692.31 ccw(c6540,3719.63) P2.38@6540,3681
A8: P2.37 U1.54 U？1.27 | length 2459.5
  Top Layer w4: U？1.27@5510,3825 5546,3825 5583,3788 v1(5583,3452) 5583,3277 5550.55,3244.55 U1.54@5550.55,3236.92 ; U？1.27@5537.12,3822.88 cw(c5542.24,3817.76) 5542.24,3825 cw(c5542.24,3832.24) U？1.27@5537.12,3827.12 ; U1.54@5548.9,3238.57 ccw(c5544.92,3242.55) 5550.55,3242.55 ccw(c5556.18,3242.55) U1.54@5552.2,3238.57 ; U1.54@5558.52,3250.56 cw(c5563.25,3250.56) 5559.91,3253.91 ; U1.54@5558.67,3249.27 cw(c5563.62,3250.43) 5560.03,3254.03 ; U1.54@5562.52,3250.56 cw(c5576.91,3250.56) 5566.74,3260.74 ; U1.54@5562.57,3250.18 cw(c5571.87,3252.36) 5565.12,3259.12 ; U1.54@5566.46,3251.09 cw(c5580.13,3254.28) 5570.2,3264.2 ; U1.54@5566.52,3250.56 cw(c5590.56,3250.56) 5573.56,3267.56 ; v1@5579.46,3448.46 cw(c5570.93,3439.93) 5583,3439.93 cw(c5595.07,3439.93) v1@5586.54,3448.46 ; v1@5579.46,3455.54 ccw(c5570.93,3464.07) 5583,3464.07 ccw(c5595.07,3464.07) v1@5586.54,3455.54 ; v1(6446.32,3391) 6455,3399.68 6455,3569 6496,3610 6585,3610 P2.37@6640,3665 ; v1@6446.32,3396 ccw(c6446.32,3408.07) 6454.86,3399.54 ccw(c6463.4,3391) v1@6451.32,3391 ; P2.37@6612,3665 cw(c6544.4,3665) 6592.2,3617.2 cw(c6640,3569.4) P2.37@6640,3637 ; P2.37@6616,3665 cw(c6558.06,3665) 6599.03,3624.03 cw(c6640,3583.06) P2.37@6640,3641 ; P2.37@6620,3665 cw(c6571.72,3665) 6605.86,3630.86 cw(c6640,3596.72) P2.37@6640,3645 ; P2.37@6624,3665 cw(c6585.37,3665) 6612.69,3637.69 cw(c6640,3610.37) P2.37@6640,3649
  Bottom Layer w4: v1@5583,3447 cw(c5583,3434.93) 5591.54,3443.46 cw(c5600.07,3452) v1@5588,3452 ; v1(5583,3452) 5644,3391 v1(6446.32,3391) ; v1@6442.79,3387.46 ccw(c6434.25,3378.93) 6434.25,3391 ccw(c6434.25,3403.07) v1@6442.79,3394.54
A9: P2.40 U1.55 U？1.26 | length 2387.8
  Top Layer w4: U？1.26@5510,3795 5544,3795 5558,3781 v1@5558,3331 ; U1.55@5536.63,3250.84 5573,3287.21 5573,3316 v1@5558,3331 ; U？1.26@5537.12,3792.88 cw(c5542.24,3787.76) 5542.24,3795 cw(c5542.24,3802.24) U？1.26@5537.12,3797.12 ; U1.55@5550.27,3266.81 ccw(c5550.27,3272.44) 5554.25,3268.46 ccw(c5558.23,3264.48) U1.55@5552.6,3264.48 ; v1@5551.46,3334.54 ccw(c5535.69,3350.31) 5558,3350.31 ; v1@5554.29,3331.71 ccw(c5545.34,3340.66) 5558,3340.66 ; v1@5555,3326 cw(c5555,3306.69) 5568.66,3320.34 ; v1@5555,3330 cw(c5555,3320.34) 5561.83,3327.17 ; v1(5555,3331) v1@5558,3331 ; v1@5560,3331 ccw(c5564.83,3331) 5561.41,3327.59 ; v1@6393.46,3369.54 ccw(c6384.93,3378.07) 6397,3378.07 ccw(c6409.07,3378.07) v1@6400.54,3369.54 ; v1(6397,3366) 6397,3622 P2.40@6540,3765 ; P2.40@6512,3765 cw(c6444.4,3765) 6492.2,3717.2 cw(c6540,3669.4) P2.40@6540,3737 ; P2.40@6516,3765 cw(c6458.06,3765) 6499.03,3724.03 cw(c6540,3683.06) P2.40@6540,3741 ; P2.40@6520,3765 cw(c6471.72,3765) 6505.86,3730.86 cw(c6540,3696.72) P2.40@6540,3745 ; P2.40@6524,3765 cw(c6485.37,3765) 6512.69,3737.69 cw(c6540,3710.37) P2.40@6540,3749
  Bottom Layer w4: v1(5555,3331) 5590,3366 v1(6397,3366) ; v1@5555,3336 ccw(c5555,3348.07) 5563.54,3339.54 ccw(c5572.07,3331) v1@5560,3331 ; v1@6393.46,3362.46 ccw(c6384.93,3353.93) 6384.93,3366 ccw(c6384.93,3378.07) v1@6393.46,3369.54
A10: P2.39 U1.56 U？1.25 | length 2931.9
  Top Layer w4: U？1.25@5510,3765 5527,3765 5548,3744 5548,3728 5538,3718 5476,3718 5472,3714 5472,3696 5539.65,3628.35 5539.65,3281.7 ; U1.56@5522.71,3264.76 5523.18,3265.24 5539.65,3281.7 ; U？1.25@5530,3765 ccw(c5537.24,3765) 5532.12,3759.88 ; U？1.25@5534,3765 ccw(c5550.9,3765) 5538.95,3753.05 ; U1.56@5534.7,3280.05 ccw(c5522.76,3291.99) 5539.65,3291.99 ; U1.56@5536.35,3280.73 ccw(c5536.35,3286.36) 5540.33,3282.38 ccw(c5544.31,3278.4) U1.56@5538.68,3278.4 ; U1.56@5537.53,3277.22 ccw(c5532.42,3282.34) 5539.65,3282.34 ; U？1.25@5538,3765 ccw(c5564.56,3765) 5545.78,3746.22 ; 5548.79,3290.85 ccw(c5538.64,3301) v1@5553,3301 ; 5551.08,3293.13 cw(c5558,3286.22) v1@5558,3296 ; v1(5558,3301) 5558,3300.05 5539.65,3281.7 ; v1@6482.46,3336.46 ccw(c6473.93,3327.93) 6473.93,3340 ccw(c6473.93,3352.07) v1@6482.46,3343.54 ; v1(6486,3340) 6469,3340 6421,3388 6421,3622 6520,3721 6560,3721 6578,3739 6578,3888 6595,3905 6661,3905 6678,3888 6678,3803 ; P2.39@6640,3765 6678,3803 ; P2.39@6642.79,3780.75 ccw(c6646.53,3801.89) 6661.71,3786.71 ccw(c6676.89,3771.53) P2.39@6655.75,3767.79 ; P2.39@6643.49,3784.69 ccw(c6648.17,3811.12) 6667.14,3792.14 ccw(c6686.12,3773.17) P2.39@6659.69,3768.49 ; P2.39@6644.19,3788.63 ccw(c6649.8,3820.34) 6672.57,3797.57 ccw(c6695.34,3774.8) P2.39@6663.63,3769.19 ; P2.39@6644.88,3792.57 ccw(c6651.43,3829.56) 6678,3803 ; P2.39@6667.57,3769.88 cw(c6704.56,3776.43) 6678,3803 ; 5539.65,3281.7 cw(c5537.17,3284.18) 5536.68,3280.71 ccw(c5537.17,3284.18) 5539.65,3281.7 ; 5539.65,3281.7 ccw(c5542.13,3279.22) 5538.66,3278.73 cw(c5542.13,3279.22) 5539.65,3281.7
  Bottom Layer w4: v1(5558,3301) 5675,3301 5723,3349 5766,3349 5783,3332 5807,3332 5812,3337 6483,3337 v1(6486,3340) ; v1@5561.54,3297.46 cw(c5570.07,3288.93) 5570.07,3301 cw(c5570.07,3313.07) v1@5561.54,3304.54 ; 6466.69,3337 ccw(c6466.69,3359.31) v1@6482.46,3343.54 ; 6476.34,3337 ccw(c6476.34,3349.66) v1@6485.29,3340.71
A11: P2.42 U1.57 U？1.24 | length 2206.4
  Top Layer w4: U？1.24@5482.88,3732.88 ccw(c5477.76,3727.76) 5477.76,3735 ccw(c5477.76,3742.24) U？1.24@5482.88,3737.12 ; U1.57@5508.79,3278.68 5523,3292.89 v1(5523,3552) 5523,3621 5462,3682 5462,3725 5472,3735 U？1.24@5510,3735 ; v1@5519.46,3548.46 cw(c5510.93,3539.93) 5523,3539.93 cw(c5535.07,3539.93) v1@5526.54,3548.46 ; v1@5519.46,3555.54 ccw(c5510.93,3564.07) 5523,3564.07 ccw(c5535.07,3564.07) v1@5526.54,3555.54 ; U1.57@5520.78,3293.97 ccw(c5515.44,3299.32) 5523,3299.32 ; v1(6075,3711) v1(6285,3921) ; v1@6075,3716 ccw(c6075,3728.07) 6083.54,3719.54 ccw(c6092.07,3711) v1@6080,3711 ; v1@6280,3921 cw(c6267.93,3921) 6276.46,3912.46 cw(c6285,3903.93) v1@6285,3916
  Bottom Layer w4: v1(5523,3552) 5916,3552 v1(6075,3711) ; v1@5526.54,3548.46 cw(c5535.07,3539.93) 5535.07,3552 cw(c5535.07,3564.07) v1@5526.54,3555.54 ; v1@6070,3711 cw(c6057.93,3711) 6066.46,3702.46 cw(c6075,3693.93) v1@6075,3706 ; v1(6285,3921) 6484,3921 P2.42@6540,3865 ; v1@6288.54,3917.46 cw(c6297.07,3908.93) 6297.07,3921 cw(c6297.07,3933.07) v1@6288.54,3924.54 ; P2.42@6512,3865 ccw(c6444.4,3865) 6492.2,3912.8 ccw(c6540,3960.6) P2.42@6540,3893 ; P2.42@6516,3865 ccw(c6458.06,3865) 6499.03,3905.97 ccw(c6540,3946.94) P2.42@6540,3889 ; P2.42@6520,3865 ccw(c6471.72,3865) 6505.86,3899.14 ccw(c6540,3933.28) P2.42@6540,3885 ; P2.42@6524,3865 ccw(c6485.37,3865) 6512.69,3892.31 ccw(c6540,3919.63) P2.42@6540,3881
A12: P3.38 U1.87 U？1.22 | length 2343
  Top Layer w4: v1@4870.46,3666.46 cw(c4861.93,3657.93) 4874,3657.93 cw(c4886.07,3657.93) v1@4877.54,3666.46 ; v1(4874,3670) 4874,3370.61 U1.87@4952.01,3292.6 ; U1.87@4936.04,3306.24 ccw(c4930.42,3306.24) 4934.39,3310.22 ccw(c4938.37,3314.2) U1.87@4938.37,3308.57 ; U？1.22@5022.88,3702.88 cw(c5012.93,3692.93) 5027,3692.93 ; v1@5023.46,3673.54 ccw(c5014.93,3682.07) 5027,3682.07 ccw(c5039.07,3682.07) v1@5030.54,3673.54 ; v1(5027,3670) 5027,3705 U？1.22@5050,3705
  Bottom Layer w4: P3.38@3625,3610 3685,3670 v1(4874,3670) v1(5027,3670) ; P3.38@3625,3626 ccw(c3625,3664.63) 3652.31,3637.31 ccw(c3679.63,3610) P3.38@3641,3610 ; P3.38@3625,3630 ccw(c3625,3678.28) 3659.14,3644.14 ccw(c3693.28,3610) P3.38@3645,3610 ; P3.38@3625,3634 ccw(c3625,3691.94) 3665.97,3650.97 ccw(c3706.94,3610) P3.38@3649,3610 ; P3.38@3625,3638 ccw(c3625,3705.6) 3672.8,3657.8 ccw(c3720.6,3610) P3.38@3653,3610 ; v1@4870.46,3666.46 ccw(c4861.93,3657.93) 4861.93,3670 ccw(c4861.93,3682.07) v1@4870.46,3673.54 ; v1@4877.54,3666.46 cw(c4886.07,3657.93) 4886.07,3670 cw(c4886.07,3682.07) v1@4877.54,3673.54 ; v1@5023.46,3666.46 ccw(c5014.93,3657.93) 5014.93,3670 ccw(c5014.93,3682.07) v1@5023.46,3673.54
A13: P3.37 U1.88 U？1.21 | length 2674
  Top Layer w4: 4852,3559.44 cw(c4884.56,3559.44) v1@4861.54,3582.46 ; 4852,3569.1 cw(c4874.9,3569.1) v1@4858.71,3585.29 ; 4852,3578.76 cw(c4865.24,3578.76) v1@4855.88,3588.12 ; v1@4853.06,3585.24 cw(c4849.34,3584.66) 4852,3582 ; v1@4854.82,3582.14 ccw(c4853.49,3580.51) 4852,3582 ; v1(4858,3586) 4856,3586 4852,3582 ; 4919.15,3296.85 ccw(c4924.45,3302.15) U1.88@4924.45,3294.65 ; U1.88@4938.1,3278.68 4937.32,3278.68 4852,3364 4852,3582 ; U？1.21@5050,3735 5111,3735 5120.5,3725.5 5120.5,3640.5 v1(5104,3624) ; U？1.21@5077.12,3732.88 cw(c5082.24,3727.76) 5082.24,3735 cw(c5082.24,3742.24) U？1.21@5077.12,3737.12 ; v1@5104,3629 ccw(c5104,3641.07) 5112.54,3632.54 ccw(c5121.07,3624) v1@5109,3624
  Bottom Layer w4: P3.37@3725,3610 4608,3610 4622,3624 4776.19,3624 4788.44,3611.74 4883.74,3611.74 ; P3.37@3736.31,3598.69 cw(c3763.63,3571.37) 3763.63,3610 cw(c3763.63,3648.63) P3.37@3736.31,3621.31 ; P3.37@3739.14,3595.86 cw(c3773.28,3561.72) 3773.28,3610 cw(c3773.28,3658.28) P3.37@3739.14,3624.14 ; P3.37@3741.97,3593.03 cw(c3782.94,3552.06) 3782.94,3610 cw(c3782.94,3667.94) P3.37@3741.97,3626.97 ; P3.37@3744.8,3590.2 cw(c3792.6,3542.4) 3792.6,3610 cw(c3792.6,3677.6) P3.37@3744.8,3629.8 ; v1(4858,3586) 4883.74,3611.74 ; v1@4858,3591 ccw(c4858,3603.07) 4866.54,3594.54 ccw(c4875.07,3586) v1@4863,3586 ; v1@5099,3624 cw(c5086.93,3624) 5095.46,3615.46 cw(c5104,3606.93) v1@5104,3619 ; v1@5100.46,3620.46 ccw(c5091.93,3611.93) 5091.93,3624 ccw(c5091.93,3636.07) v1@5100.46,3627.54 ; 4883.74,3611.74 5091.74,3611.74 v1(5104,3624) 4896,3624 4883.74,3611.74
A14: P3.36 U1.89 U？1.20 | length 3574.6
  Top Layer w4: v1@4823.46,3643.46 cw(c4814.93,3634.93) 4827,3634.93 cw(c4839.07,3634.93) v1@4830.54,3643.46 ; v1(4827,3647) 4827,3262.82 4832,3257.82 4851.76,3257.82 4880,3286.06 4902.88,3286.06 U1.89@4924.18,3264.76 ; U1.89@4908.2,3278.4 ccw(c4902.58,3278.4) 4906.56,3282.38 ccw(c4910.53,3286.36) U1.89@4910.53,3280.73 ; v1@5007.22,3757.42 ccw(c5006.24,3760) 5009,3760 ; v1(5009,3752.74) 5009,3760 ; v1@5009.83,3753.31 cw(c5015.2,3756.99) 5010.59,3761.59 ; v1@5010.78,3757.42 cw(c5011.76,3760) 5009,3760 ; v1@5013.13,3755.57 cw(c5019.24,3759.76) 5014,3765 ; U？1.20@5022.88,3762.88 ccw(c5017.76,3757.76) 5017.76,3765 ccw(c5017.76,3772.24) U？1.20@5022.88,3767.12 ; U？1.20@5050,3765 5014,3765 ; 5009,3760 5014,3765
  Bottom Layer w4: 4812.51,3648 cw(c4812.51,3632.51) v1@4823.46,3643.46 ; 4817.34,3648 ccw(c4817.34,3656.66) v1@4823.46,3650.54 ; v1@4822,3647 ccw(c4809.93,3647) 4818.46,3655.54 ccw(c4827,3664.07) v1@4827,3652 ; v1(4827,3647) v1@4826,3648 ; v1@4830.54,3643.46 cw(c4841.49,3632.51) 4841.49,3648 ; v1@4830.54,3650.54 ccw(c4836.66,3656.66) 4836.66,3648 ; v1@5009,3747.74 cw(c5009,3735.67) 5017.54,3744.21 cw(c5026.07,3752.74) v1@5014,3752.74 ; v1(5009,3752.74) 5063,3698.74 5063,3680 5031,3648 v1@4826,3648 ; 3650,3535 3625,3535 P3.36@3625,3510 3650,3535 ; 3650,3535 3658,3535 3677,3554 3677,3639 ; 3650,3535 3676.67,3561.67 3676.67,3638.67 3677,3639 ; 3677,3639 3696,3658 3779,3658 ; 3779,3658 3789,3648 v1@4826,3648 ; 3779,3658 4816,3658 v1@4826,3648
A15: P3.35 U1.90 U？1.19 | length 2941.6
  Top Layer w4: U1.90@4910.26,3250.84 4928.1,3233 4977,3233 v1(5004,3260) ; U1.90@4922.72,3236.02 ccw(c4930.01,3243.31) 4930.01,3233 ; U1.90@4923.9,3234.87 cw(c4923.9,3229.24) 4927.88,3233.22 cw(c4931.85,3237.2) U1.90@4926.23,3237.2 ; U1.90@4925.55,3238.85 ccw(c4939.67,3252.97) 4939.67,3233 ; v1@4999,3260 cw(c4986.93,3260) 4995.46,3251.46 cw(c5004,3242.93) v1@5004,3255 ; U？1.19@5050,3795 5088,3795 ; U？1.19@5077.12,3792.88 cw(c5082.24,3787.76) 5082.24,3795 cw(c5082.24,3802.24) U？1.19@5077.12,3797.12 ; v1@5091.32,3779.75 ccw(c5077.8,3784.8) 5088,3795 ; 5092.4,3790.6 cw(c5084.2,3782.4) v1@5095.06,3778.35 ; v1@5092.46,3766.54 ccw(c5083.93,3775.07) 5096,3775.07 ccw(c5108.07,3775.07) v1@5099.54,3766.54 ; v1@5092.46,3774.46 cw(c5083.93,3765.93) 5096,3765.93 cw(c5108.07,3765.93) v1@5099.54,3774.46 ; v1@5093.36,3767.25 ccw(c5091.71,3769.89) 5094.72,3770.7 ccw(c5098.81,3771.79) v1@5097.52,3767.76 ; v1@5093.36,3782.25 ccw(c5090.4,3787) 5096,3787 ; v1@5094.48,3767.76 ccw(c5093.19,3771.79) 5097.28,3770.7 ccw(c5100.28,3769.89) v1@5098.64,3767.25 ; v1(5096,3763) v1(5096,3778) 5096,3787 ; 5096.8,3786.2 cw(c5090.61,3780.01) v1@5098.81,3776.95 ; v1@5098.64,3782.25 cw(c5101.6,3787) 5096,3787 ; 5088,3795 5096,3787
  Bottom Layer w4: P3.35@3697.43,3514.88 ccw(c3660.44,3521.43) 3687,3548 ; P3.35@3701.37,3514.19 ccw(c3669.66,3519.8) 3692.43,3542.57 ccw(c3715.2,3565.34) P3.35@3720.81,3533.63 ; P3.35@3705.31,3513.49 ccw(c3678.88,3518.17) 3697.86,3537.14 ccw(c3716.83,3556.12) P3.35@3721.51,3529.69 ; P3.35@3709.25,3512.79 ccw(c3688.11,3516.53) 3703.29,3531.71 ccw(c3718.47,3546.89) P3.35@3722.21,3525.75 ; P3.35@3720.12,3537.57 cw(c3713.57,3574.56) 3687,3548 ; P3.35@3725,3510 3687,3548 ; v1@4999,3260 ccw(c4986.93,3260) 4995.46,3268.54 ccw(c5004,3277.07) v1@5004,3265 ; v1(5004,3260) 4953,3311 4953,3442 5127,3616 5127,3629 5080,3676 5080,3747 v1(5096,3763) ; v1@5091,3763 cw(c5078.93,3763) 5087.46,3754.46 cw(c5096,3745.93) v1@5096,3758 ; v1@5091,3778 cw(c5078.93,3778) 5087.46,3769.46 cw(c5096,3760.93) v1@5096,3773 ; v1(5096,3778) 5073,3755 5073,3660.56 5050,3637.56 4850.56,3637.56 4838,3625 4810,3625 4799,3636 3754,3636 3742,3648 3703,3648 3687,3632 3687,3548
A16: P3.41 U1.80 U？1.18 | length 2191.7
  Top Layer w4: v1(4905,3825) 5011,3825 ; v1@4908.54,3821.46 cw(c4917.07,3812.93) 4917.07,3825 cw(c4917.07,3837.07) v1@4908.54,3828.54 ; U？1.18@5022.88,3822.88 ccw(c5017.76,3817.76) 5017.76,3825 ccw(c5017.76,3832.24) U？1.18@5022.88,3827.12 ; 5027.88,3402.72 ccw(c5027.88,3411.6) U1.80@5034.16,3405.32 ; U1.80@5049.45,3390.04 5036.76,3402.72 5027.28,3402.72 4997,3433 4997,3721.54 4994,3724.54 4994,3808 5011,3825 ; U？1.18@5050,3825 5011,3825
  Bottom Layer w4: P3.41@3725,3810 4890,3810 v1(4905,3825) ; P3.41@3736.31,3798.69 cw(c3763.63,3771.37) 3763.63,3810 cw(c3763.63,3848.63) P3.41@3736.31,3821.31 ; P3.41@3739.14,3795.86 cw(c3773.28,3761.72) 3773.28,3810 cw(c3773.28,3858.28) P3.41@3739.14,3824.14 ; P3.41@3741.97,3793.03 cw(c3782.94,3752.06) 3782.94,3810 cw(c3782.94,3867.94) P3.41@3741.97,3826.97 ; P3.41@3744.8,3790.2 cw(c3792.6,3742.4) 3792.6,3810 cw(c3792.6,3877.6) P3.41@3744.8,3829.8 ; v1@4900,3825 cw(c4887.93,3825) 4896.46,3816.46 cw(c4905,3807.93) v1@4905,3820
A17: P3.40 U1.81 U？1.23 | length 2837.2
  Top Layer w4: v1@4973.46,3733.46 cw(c4964.93,3724.93) 4977,3724.93 cw(c4989.07,3724.93) v1@4980.54,3733.46 ; v1(4977,3737) 4977,3711.54 4987,3701.54 4987,3424.65 U1.81@5035.53,3376.12 5058.82,3352.82 ; U1.81@5019.56,3389.76 ccw(c5013.93,3389.76) 5017.91,3393.74 ccw(c5021.89,3397.71) U1.81@5021.89,3392.09 ; U1.81@5044.63,3367.02 ccw(c5066.82,3389.21) v1@5066.82,3357.82 ; U1.81@5049.17,3360.14 cw(c5049.17,3354.52) 5053.15,3358.5 cw(c5057.13,3362.47) U1.81@5051.5,3362.47 ; U1.81@5051.46,3360.19 ccw(c5066.82,3375.55) v1@5066.82,3353.82 ; 5058.29,3353.36 ccw(c5066.82,3361.9) v1@5066.82,3349.82 ; v1@5062.33,3350.63 ccw(c5058.82,3348.92) 5058.82,3352.82 ; v1@5062.33,3355.01 cw(c5058.82,3356.72) 5058.82,3352.82 ; v1(5066.82,3352.82) 5058.82,3352.82 ; v1@5502.5,3694.77 ccw(c5499.27,3705) U？1.23@5510,3705 5510,3696 ; v1@5503.7,3690.95 ccw(c5500.99,3699.55) 5510,3699.55 ; v1(5504,3690) 5510,3696 ; v1@5504.9,3687.14 ccw(c5502.71,3694.09) 5510,3694.09 ; v1@5505.38,3694.81 ccw(c5506.68,3699.32) 5510,3696 ; U？1.23@5507.88,3702.88 cw(c5502.76,3697.76) 5510,3697.76 cw(c5517.24,3697.76) U？1.23@5512.12,3702.88 ; v1@5508.81,3691.38 cw(c5513.32,3692.68) 5510,3696
  Bottom Layer w4: P3.40@3625,3710 3663,3748 ; P3.40@3627.79,3725.75 ccw(c3631.53,3746.89) 3646.71,3731.71 ccw(c3661.89,3716.53) P3.40@3640.75,3712.79 ; P3.40@3628.49,3729.69 ccw(c3633.17,3756.12) 3652.14,3737.14 ccw(c3671.12,3718.17) P3.40@3644.69,3713.49 ; P3.40@3629.19,3733.63 ccw(c3634.8,3765.34) 3657.57,3742.57 ccw(c3680.34,3719.8) P3.40@3648.63,3714.19 ; P3.40@3629.88,3737.57 ccw(c3636.43,3774.56) 3663,3748 ; P3.40@3652.57,3714.88 cw(c3689.56,3721.43) 3663,3748 ; v1@4972,3737 ccw(c4959.93,3737) 4968.46,3745.54 ccw(c4977,3754.07) v1@4977,3742 ; v1(4977,3737) 4966,3748 3663,3748 ; v1(5066.82,3352.82) 5143.35,3429.35 5239.06,3429.35 5499.71,3690 v1(5504,3690) ; v1@5066.82,3357.82 ccw(c5066.82,3369.9) 5075.36,3361.36 ccw(c5083.9,3352.82) v1@5071.82,3352.82 ; 5488.14,3678.43 cw(c5504,3662.57) v1@5504,3685 ; 5494.97,3685.26 cw(c5504,3676.23) v1@5504,3689
A18: P3.39 U1.82 U？1.28 | length 3243.8
  Top Layer w4: v1@4959.54,3705 cw(c4959.54,3692.93) 4968.08,3701.46 cw(c4976.61,3710) v1@4964.54,3710 ; v1(4959.54,3710) 4977,3692.54 4977,3406.81 U1.82@5021.61,3362.2 ; U1.82@5005.64,3375.84 ccw(c5000.01,3375.84) 5003.99,3379.82 ccw(c5007.97,3383.79) U1.82@5007.97,3378.17 ; v1@5008.46,3681.46 cw(c4999.93,3672.93) 5012,3672.93 cw(c5024.07,3672.93) v1@5015.54,3681.46 ; v1(5012,3685) 5012,3448 v1(5030,3430) ; v1@5025,3430 ccw(c5012.93,3430) 5021.46,3438.54 ccw(c5030,3447.07) v1@5030,3435 ; U？1.28@5510,3855 5546,3855 ; U？1.28@5537.12,3852.88 cw(c5542.24,3847.76) 5542.24,3855 cw(c5542.24,3862.24) U？1.28@5537.12,3857.12 ; v1@5542.48,3846.55 ccw(c5534.1,3855) 5546,3855 ; v1(5546,3843) 5546,3855 ; v1@5549.52,3846.55 cw(c5557.9,3855) 5546,3855
  Bottom Layer w4: P3.39@3725,3710 v1(4959.54,3710) 4987,3710 v1(5012,3685) ; P3.39@3736.31,3698.69 cw(c3763.63,3671.37) 3763.63,3710 cw(c3763.63,3748.63) P3.39@3736.31,3721.31 ; P3.39@3739.14,3695.86 cw(c3773.28,3661.72) 3773.28,3710 cw(c3773.28,3758.28) P3.39@3739.14,3724.14 ; P3.39@3741.97,3693.03 cw(c3782.94,3652.06) 3782.94,3710 cw(c3782.94,3767.94) P3.39@3741.97,3726.97 ; P3.39@3744.8,3690.2 cw(c3792.6,3642.4) 3792.6,3710 cw(c3792.6,3777.6) P3.39@3744.8,3729.8 ; v1@4956,3706.46 ccw(c4947.47,3697.93) 4947.47,3710 ccw(c4947.47,3722.07) v1@4956,3713.54 ; v1@4963.08,3706.46 cw(c4971.61,3697.93) 4971.61,3710 cw(c4971.61,3722.07) v1@4963.08,3713.54 ; v1@5007,3685 ccw(c4994.93,3685) 5003.46,3693.54 ccw(c5012,3702.07) v1@5012,3690 ; v1(5030,3430) 5041,3441 5231,3441 5546,3756 v1(5546,3843) ; v1@5030,3435 ccw(c5030,3447.07) 5038.54,3438.54 ccw(c5047.07,3430) v1@5035,3430 ; v1@5542.46,3839.46 cw(c5533.93,3830.93) 5546,3830.93 cw(c5558.07,3830.93) v1@5549.54,3839.46
BOOT0: P5.3 U1.138 | length 2814.1
  Top Layer w4: v1@4951.46,2310.54 ccw(c4942.93,2319.07) 4955,2319.07 ccw(c4967.07,2319.07) v1@4958.54,2310.54 ; v1(4955,2307) 4955,2335.15 U1.138@5063.37,2443.52 ; v1@5017.72,2173.21 cw(c5009.18,2164.68) 5021.25,2164.68 cw(c5033.32,2164.68) v1@5024.79,2173.21 ; v1(5021.25,2176.75) 5021.25,1569 5049,1569 5072,1546 v1(5072,1469) ; U1.138@5047.4,2429.88 cw(c5041.77,2429.88) 5045.75,2425.9 cw(c5049.73,2421.92) U1.138@5049.73,2427.54 ; v1@5068.46,1472.54 ccw(c5059.93,1481.07) 5072,1481.07 ccw(c5084.07,1481.07) v1@5075.54,1472.54
  Bottom Layer w4: v1@4951.46,2303.46 cw(c4942.93,2294.93) 4955,2294.93 cw(c4967.07,2294.93) v1@4958.54,2303.46 ; v1(4955,2307) 4955,2243 v1(5021.25,2176.75) ; v1@5016.25,2176.75 ccw(c5004.18,2176.75) 5012.72,2185.28 ccw(c5021.25,2193.82) v1@5021.25,2181.75 ; v1(5072,1469) 6603,1469 6620,1486 ; v1@5075.54,1465.46 cw(c5084.07,1456.93) 5084.07,1469 cw(c5084.07,1481.07) v1@5075.54,1472.54 ; P5.3@6614.63,1492.52 cw(c6613.36,1486) 6620,1486 ; P5.3@6620,1520 6620,1486 ; P5.3@6625.37,1492.52 ccw(c6626.64,1486) 6620,1486
BOOT1: P1.29 P2.33 P5.4 U1.48 | length 5672
  Top Layer w4: U1.48@5634.07,3153.41 5657.33,3176.67 5657.33,3205.33 5660,3208 ; U1.48@5647.71,3169.38 ccw(c5647.71,3175) 5651.69,3171.03 ccw(c5655.66,3167.05) U1.48@5650.04,3167.05 ; v1@5667.23,3204.71 ccw(c5660,3198.4) 5660,3208 ; v1@5667.23,3211.29 cw(c5660,3217.6) 5660,3208 ; v1(5671,3208) 5660,3208 ; v1(6586,3227) 6602,3243 ; v1@6586,3232 ccw(c6586,3244.07) 6594.54,3235.54 ccw(c6603.07,3227) v1@6591,3227 ; P5.4@6592.43,1624.88 ccw(c6555.44,1631.43) 6582,1658 ; P5.4@6596.37,1624.19 ccw(c6564.66,1629.8) 6587.43,1652.57 ccw(c6610.2,1675.34) P5.4@6615.81,1643.63 ; P5.4@6600.31,1623.49 ccw(c6573.88,1628.17) 6592.86,1647.14 ccw(c6611.83,1666.12) P5.4@6616.51,1639.69 ; P5.4@6604.25,1622.79 ccw(c6583.11,1626.53) 6598.29,1641.71 ccw(c6613.47,1656.89) P5.4@6617.21,1635.75 ; P2.33@6612.43,3460.12 cw(c6575.44,3453.57) 6602,3427 ; P5.4@6615.12,1647.57 cw(c6608.57,1684.56) 6582,1658 ; P2.33@6616.37,3460.81 cw(c6584.66,3455.2) 6607.43,3432.43 cw(c6630.2,3409.66) P2.33@6635.81,3441.37 ; P5.4@6620,1620 6582,1658 ; P2.33@6620.31,3461.51 cw(c6593.88,3456.83) 6612.86,3437.86 cw(c6631.83,3418.88) P2.33@6636.51,3445.31 ; P2.33@6624.25,3462.21 cw(c6603.11,3458.47) 6618.29,3443.29 cw(c6633.47,3428.11) P2.33@6637.21,3449.25 ; P2.33@6635.12,3437.43 ccw(c6628.57,3400.44) 6602,3427 ; P2.33@6640,3465 6602,3427 ; 6582,1658 6582,1923 6602,1943 6602,3243 ; 6602,3243 6602,3427
  Bottom Layer w4: v1@5671,3203 cw(c5671,3171.62) 5693.19,3193.81 ; v1@5671,3207 cw(c5671,3185.27) 5686.36,3200.64 ; v1(5671,3208) 5679,3208 ; v1@5671,3211 cw(c5671,3198.93) 5679.54,3207.46 ; v1@5675.49,3205.81 cw(c5679,3204.1) 5679,3208 ; v1@5675.49,3210.19 ccw(c5679,3211.9) 5679,3208 ; P1.29@5700.2,4610.2 cw(c5652.4,4562.4) 5720,4562.4 cw(c5787.6,4562.4) P1.29@5739.8,4610.2 ; P1.29@5703.03,4613.03 cw(c5662.06,4572.06) 5720,4572.06 cw(c5777.94,4572.06) P1.29@5736.97,4613.03 ; P1.29@5705.86,4615.86 cw(c5671.72,4581.72) 5720,4581.72 cw(c5768.28,4581.72) P1.29@5734.14,4615.86 ; P1.29@5708.69,4618.69 cw(c5681.37,4591.37) 5720,4591.37 cw(c5758.63,4591.37) P1.29@5731.31,4618.69 ; P1.29@5720,4630 5720,4391 6486,3625 6486,3520 6503,3503 6602,3503 ; v1@6582.46,3223.46 ccw(c6573.93,3214.93) 6573.93,3227 ccw(c6573.93,3239.07) v1@6582.46,3230.54 ; v1(6586,3227) 6454.51,3227 6450.51,3223 5878.95,3223 5875.95,3226 5786.31,3226 5742.31,3182 5705,3182 5679,3208 ; P2.33@6612.43,3469.88 ccw(c6575.44,3476.43) 6602,3503 ; P2.33@6616.37,3469.19 ccw(c6584.66,3474.8) 6607.43,3497.57 ccw(c6630.2,3520.34) P2.33@6635.81,3488.63 ; P2.33@6620.31,3468.49 ccw(c6593.88,3473.17) 6612.86,3492.14 ccw(c6631.83,3511.12) P2.33@6636.51,3484.69 ; P2.33@6624.25,3467.79 ccw(c6603.11,3471.53) 6618.29,3486.71 ccw(c6633.47,3501.89) P2.33@6637.21,3480.75 ; P2.33@6635.12,3492.57 cw(c6628.57,3529.56) 6602,3503 ; P2.33@6640,3465 6602,3503
D0: P1.6 U1.85 U？1.7 | length 2343.5
  Top Layer w4: P1.6@4520,4730 4558,4692 ; P1.6@4522.79,4714.25 cw(c4526.53,4693.11) 4541.71,4708.29 cw(c4556.89,4723.47) P1.6@4535.75,4727.21 ; P1.6@4523.49,4710.31 cw(c4528.17,4683.88) 4547.14,4702.86 cw(c4566.12,4721.83) P1.6@4539.69,4726.51 ; P1.6@4524.19,4706.37 cw(c4529.8,4674.66) 4552.57,4697.43 cw(c4575.34,4720.2) P1.6@4543.63,4725.81 ; P1.6@4524.88,4702.43 cw(c4531.43,4665.44) 4558,4692 ; P1.6@4547.57,4725.12 ccw(c4584.56,4718.57) 4558,4692 ; v1@4606,4143 ccw(c4593.93,4143) 4602.46,4151.54 ccw(c4611,4160.07) v1@4611,4148 ; v1(4611,4143) 4558,4196 4558,4692 ; v1@4938.46,3797.46 cw(c4929.93,3788.93) 4942,3788.93 cw(c4954.07,3788.93) v1@4945.54,3797.46 ; v1(4942,3801) 4942,3727 4926,3711 4926,3374.29 U1.85@4979.85,3320.44 ; U1.85@4963.88,3334.08 ccw(c4958.26,3334.08) 4962.23,3338.06 ccw(c4966.21,3342.04) U1.85@4966.21,3336.41 ; v1(5003,4143) 5015,4155 U？1.7@5050,4155 ; v1@5003,4148 ccw(c5003,4160.07) 5011.54,4151.54 ccw(c5020.07,4143) v1@5008,4143 ; U？1.7@5022.88,4152.88 ccw(c5017.76,4147.76) 5017.76,4155 ccw(c5017.76,4162.24) U？1.7@5022.88,4157.12
  Bottom Layer w4: v1(4611,4143) v1(5003,4143) 4920,4060 4920,3823 v1(4942,3801) ; v1@4614.54,4139.46 cw(c4623.07,4130.93) 4623.07,4143 cw(c4623.07,4155.07) v1@4614.54,4146.54 ; v1@4937,3801 ccw(c4924.93,3801) 4933.46,3809.54 ccw(c4942,3818.07) v1@4942,3806 ; v1@4998,4143 cw(c4985.93,4143) 4994.46,4134.46 cw(c5003,4125.93) v1@5003,4138 ; v1@4999.46,4139.46 ccw(c4990.93,4130.93) 4990.93,4143 ccw(c4990.93,4155.07) v1@4999.46,4146.54